# Altium PCB CL-HC-V2.1 浮点阀.PcbDoc (part 2 of 2)
Units mil, origin at the board's own origin, x right, y up, seen from the top; angles counter-clockwise.
Board outline 12846.15 x 9153.85 mil, 2 copper layers (TopLayer, BottomLayer); 128 components, 528 nets, 506 pads, 1 vias.
Unrouted connection lines stored in the file: 31.
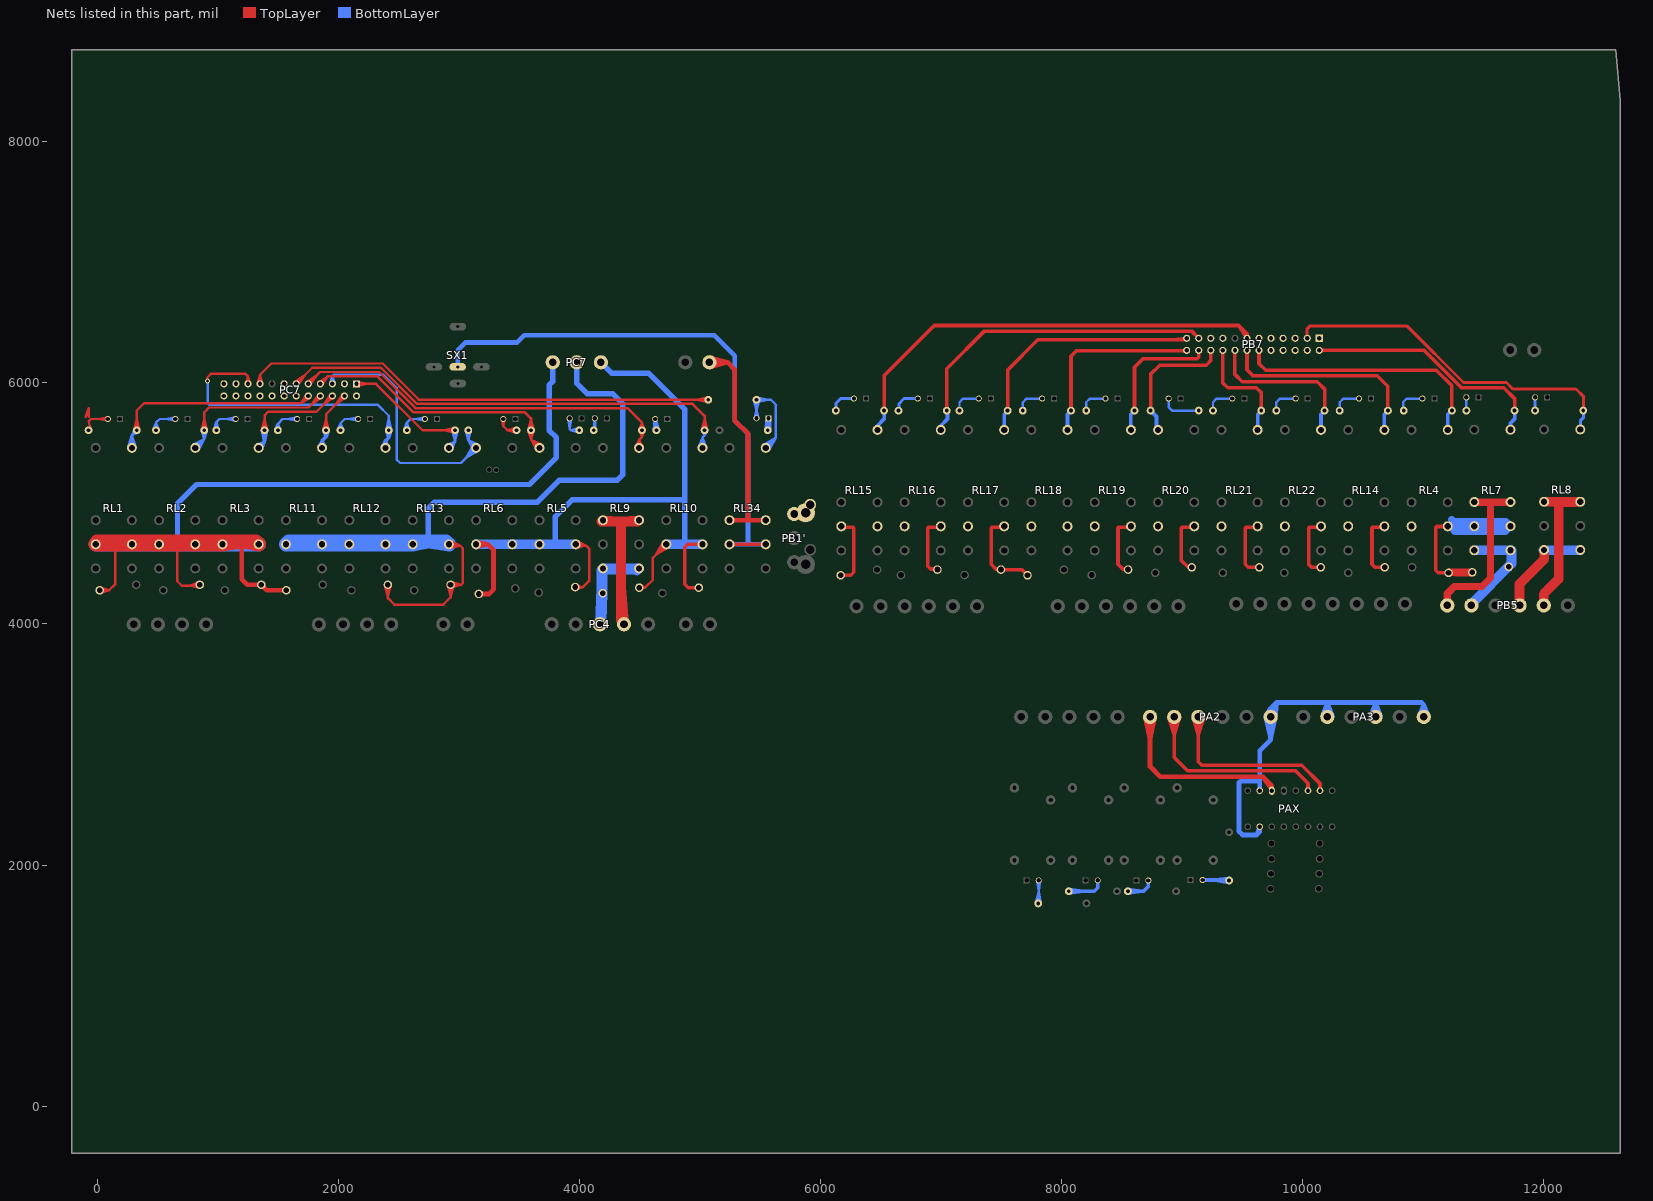
[diagram p2: the nets of this part, all layers, seen from the top]

## Via types
v1: diameter 40, hole 24, TopLayer to BottomLayer, tented both sides, 1 vias

## Nets (pads, with @x,y where several pads share a name; then routed paths per layer and width w, separated by ;. In a path a pad name is that pad's centre, name@x,y a point inside that pad or via, vN(x,y) a via of type N, cw(c..) or ccw(c..) an arc to the next point about the centre after c; other vN are vias at no path point) (continued)
GND: D110.K PA2.1 PA3.2 PA3.4 PA3.6 PAX.3 PAX.4 PB7.17 PC7.17 R293.1 R293.2 RL34.1 | length 11506.6
  TopLayer w20: PC7.17@1332.98,5994.1 1352.35,6067.35 ; PC7.17@1371.71,5994.1 1352.35,6067.35 ; R293.1@5067.1,5837.02 4977.49,5860 ; R293.1@5067.43,5881.68 4977.49,5860 ; R293.1@5070,5859.33 4977.49,5860 ; R293.1@5080,5860 2670,5860 2370,6160 1445,6160 1352.35,6067.35 ; 1352.35,6067.35 PC7.17@1352.35,5991.59 1352.35,6067.35
  BottomLayer w20: R293.2@5447.67,5856.59 5470,5766.83 R293.2@5492.33,5856.59 ; D110.K@5456.42,5707.03 5470,5789.55 D110.K@5483.58,5707.03 ; D110.K@5470,5705.92 R293.2@5470,5859.33 5562.51,5860 ; R293.2@5472.57,5881.68 5562.51,5860 ; R293.2@5472.9,5837.02 5562.51,5860 ; R293.2@5480,5860 5590,5860 5630,5820 5630,5543.74 ; RL34.1@5527.68,5485.35 5630,5543.74 ; RL34.1@5539.08,5468.84 5630,5543.74 ; RL34.1@5546.7,5460.44 5630,5543.74 ; RL34.1@5555.09,5452.82 5630,5543.74 ; RL34.1@5571.61,5441.43 5630,5543.74
  BottomLayer w40: PAX.3@9644.59,2617.3 9644.59,2695.06 ; PA2.1@9696.29,3224.64 9735.11,3049.84 ; PA2.1@9701.77,3249.24 9785.44,3348.9 ; PA2.1@9772.99,3219.37 9785.44,3348.9 ; PA2.1@9773.93,3224.64 9735.11,3049.84 ; PA3.2@10166.94,3235.45 10205.44,3345.28 ; 10191.82,3348.9 9785.44,3348.9 ; PA3.2@10205.44,3228.9 10205.44,3345.28 ; PA3.2@10243.94,3235.45 10205.44,3345.28 ; PA3.4@10566.97,3235.6 10605.44,3342.65 ; PA3.4@10605.44,3228.9 10605.44,3342.65 ; PA3.4@10643.92,3235.6 10605.44,3342.65 ; PA3.6@10967.14,3236.53 11005.44,3328.9 ; PA3.6@11005.44,3228.9 11005.44,3328.9 ; PA3.6@11043.75,3236.53 11005.44,3328.9 ; 9619.8,2250.42 PAX.4@9644.59,2317.3 ; 9619.8,2250.42 9502.3,2250.42 9471.39,2281.34 9471.39,2683.96 9482.48,2695.06 9644.59,2695.06 ; 9619.8,2250.42 9644.59,2275.21 ; 9644.59,2275.21 PAX.4@9644.59,2317.3 ; 9644.59,2275.21 PAX.4@9644.59,2317.3 ; 9644.59,2695.06 9644.59,2949.15 9735.11,3039.68 PA2.1@9735.11,3228.9 ; 9735.11,3049.84 PA2.1@9735.11,3228.9 ; PA2.1@9735.11,3228.9 9735.11,3298.57 ; PA2.1@9735.11,3228.9 9785.44,3348.9 ; PA2.1@9735.11,3228.9 9735.11,3298.57 ; 9735.11,3298.57 9772.6,3239.85 9735.11,3298.57 ; 9735.11,3298.57 9697.62,3239.85 9735.11,3298.57 ; 9735.11,3298.57 9785.44,3348.9 ; 10205.44,3345.28 10201.82,3348.9 10599.19,3348.9 ; 10599.19,3348.9 10985.44,3348.9 11005.44,3328.9 ; 10599.19,3348.9 10605.44,3342.65
IN2-A+: 
IN2-B-: 
IN-A+: 
IN-B-: 
L: pad.0@5876.88,4922.18 PB1'.3 PB1.2 RL4.4 RL7.4 RL14.4 RL15.4 RL16.4 RL17.4 RL18.4 RL19.4 RL20.4 RL21.4 RL22.4 RN1.1 RN2.1 RN3.1 RN4.1 RN5.1 RN6.1 RN11.1 RN12.1 RN13.1 RN14.1 RN21.1 | length 6808.8
  TopLayer w30: RN1.1@6168.25,4403.5 6252.7,4403.5 6276.74,4427.54 6276.74,4795.14 6268.4,4803.48 RL15.4@6177.43,4803.48 ; RN2.1@6977.89,4455.36 6914.78,4455.36 6891.27,4478.87 6891.27,4795.14 6899.61,4803.48 RL16.4@6990.58,4803.48 ; RN3.1@7498.23,4450.9 7670.85,4450.9 RN4.1@7718.25,4403.5 ; RN3.1@7503.6,4455.36 7455.63,4455.36 7416.98,4494.01 7416.98,4795.14 7425.32,4803.48 RL17.4@7516.3,4803.48 ; RN5.1@8555.03,4455.36 8507.06,4455.36 8468.4,4494.01 8468.4,4795.14 8476.75,4803.48 RL19.4@8567.72,4803.48 ; RN6.1@9080.61,4455.36 RN6.1@9080.74,4455.36 ; RN6.1@9080.61,4469.17 9050.59,4469.17 8994.12,4525.65 8994.12,4795.14 9002.46,4803.48 RL20.4@9093.43,4803.48 ; RL21.4@9623.41,4803.48 9532.44,4803.48 9524.1,4795.14 9524.1,4494.01 9548.94,4469.17 RN12.1@9629.17,4469.17 ; RL22.4@10149.12,4803.48 10058.15,4803.48 10049.81,4795.14 10049.81,4494.01 10074.65,4469.17 RN13.1@10150.61,4469.17 RN13.1@10154.88,4469.17 ; RL14.4@10674.84,4803.48 10583.86,4803.48 10575.52,4795.14 10575.52,4494.01 10600.37,4469.17 RN14.1@10680.61,4469.17 ; RL4.4@11203.32,4808.24 11112.34,4808.24 11104,4799.9 11104,4445.76 11126.27,4423.5 RN21.1@11209.07,4423.5
  TopLayer w60: RN21.1@11209.07,4423.5 11213.63,4428.06 RN11.1@11407.27,4428.06 ; 11270.19,4423.5 RN11.1@11392.11,4423.5
  BottomLayer w60: RL4.4@11204.09,4809.8 11205.21,4810.92 RL7.4@11424.12,4810.92 RL7.4@11724.12,4810.92 ; 11237.44,4866.91 11255.71,4848.63 11686.4,4848.63 RL7.4@11724.12,4810.92 ; 11255.71,4773.21 11260.85,4768.07 11681.27,4768.07 RL7.4@11724.12,4810.92
LAMP1: 
LAMP2: 
LAMP3: 
LAMP4: 
LAMP5: 
LAMP6: 
LAMP7: 
LAMP8: 
LAMP9: 
LAMP10: 
LAMP11: 
LAMP12: 
LAMP13: 
LAMP14: 
LOUT1: 
LOUT2: 
LOUT3: 
LOUT4: 
LOUT5: 
LOUT6: 
LOUT7: 
LOUT8: 
LOUT9: 
LOUT10: 
LOUT11: 
LOUT12: 
LOUT13: 
LOUT14: 
L加热: PC7.2@3980,6170 RL11.4 RL12.4 RL13.4 RN10.1 RN17.1 | length 12027.9
  TopLayer w20: RN10.1@2387.67,4321.84 2412.88,4229.79 RN10.1@2438.09,4321.84 ; RN10.1@2412.88,4325.23 2412.88,4213.77 2465.94,4160.71 2872.44,4160.71 2932.88,4221.15 RN17.1@2932.88,4325.23 3020.89,4325.23 ; RN17.1@2907.67,4321.84 2932.88,4229.79 RN17.1@2958.09,4321.84 ; RL13.4@2917.15,4649.21 2961.7,4648.77 ; RL13.4@2917.98,4649.13 3012.85,4648.77 ; RL13.4@2920.03,4629.13 3012.85,4648.77 ; RL13.4@2920.77,4671.59 3012.85,4648.77 ; RL13.4@2921.65,4629.24 2961.7,4648.77 ; RL13.4@2923.04,4670.92 2961.7,4648.77 ; RL13.4@2927.64,4690.48 3012.85,4648.77 ; RN17.1@2936.55,4300.06 3020.89,4325.23 ; RN17.1@2936.55,4350.39 3020.89,4325.23 ; RL13.4@2937.03,4685.87 2961.7,4648.77 ; 2961.7,4648.77 3012.85,4648.77 ; 2961.7,4648.77 RL13.4@2918.7,4660.44 3012.85,4648.77 ; 3012.85,4648.77 3034.55,4627.06 3034.55,4338.89 3020.89,4325.23
  BottomLayer w45: 2746.16,4683.35 2746.16,4958.72 2797.85,5010.41 3653,5010.41 3832.82,5190.24 4315.2,5190.24 4362.49,5237.53 4362.49,5825 4277.49,5910 4065.81,5910 3980,5995.81 PC7.2@3980,6170
  BottomLayer w118.11: 1692.12,4683.35 RL12.4@2092.83,4660.44 ; 1991.8,4683.35 RL12.4@2392.83,4660.44 ; 2217.55,4683.35 RL13.4@2618.7,4660.44 ; RL11.4@1566.95,4660.44 RL11.4@1589.86,4683.35 ; RL11.4@1566.95,4660.44 1972.97,4683.35 RL11.4@1866.95,4660.44 ; RL11.4@1566.95,4660.44 RL11.4@1866.95,4660.44 ; RL11.4@1589.86,4683.35 2746.16,4683.35 ; RL11.4@1589.86,4683.35 RL11.4@1866.95,4660.44 ; RL11.4@1866.95,4660.44 2268.03,4683.35 RL12.4@2092.83,4660.44 ; RL11.4@1866.95,4660.44 RL12.4@2092.83,4660.44 ; RL12.4@2092.83,4660.44 2493.73,4683.35 RL12.4@2392.83,4660.44 ; RL12.4@2092.83,4660.44 RL12.4@2392.83,4660.44 ; RL12.4@2392.83,4660.44 2746.16,4683.35 ; RL12.4@2392.83,4660.44 RL13.4@2618.7,4660.44 ; RL13.4@2618.7,4660.44 2746.16,4683.35 ; RL13.4@2618.7,4660.44 2746.16,4683.35 ; 2746.16,4683.35 2895.8,4683.35 RL13.4@2918.7,4660.44 2746.16,4683.35
L变频: PC7.3@4180,6170 RL5.4 RL6.4 RL10.4 RL34.4 RN8.1 RN9.1 RN23.1 RN24.1 SX1.4 | length 13107.6
  TopLayer w20: RL5.4@3965.44,4650.21 4056.41,4650.21 ; RN8.1@3965.81,4305.9 4026.1,4302.09 ; RN8.1@3969.59,4280.75 4026.1,4302.09 ; RL5.4@3969.85,4649.12 4056.41,4650.21 ; RL5.4@3970.45,4660.44 4056.41,4650.21 ; RL5.4@3972.44,4629.17 4056.41,4650.21 ; RL5.4@3972.52,4671.59 4056.41,4650.21 ; RN8.1@3972.72,4330.38 4026.1,4302.09 ; RN8.1@3978.13,4302.09 4026.1,4302.09 ; RL5.4@3979.73,4690.38 4056.41,4650.21 ; RN23.1@4497.57,4301.14 4545.54,4301.14 ; RN23.1@4504.31,4276.62 4545.54,4301.14 ; RN23.1@4504.31,4325.66 4545.54,4301.14 ; RL10.4@4697.19,4679.33 4639.05,4576.34 ; RL10.4@4711.02,4648.31 4610,4547.29 4610,4365.6 4545.54,4301.14 ; RL10.4@4713.76,4668.02 4639.05,4576.34 ; RL10.4@4722.2,4660.44 4639.05,4576.34 ; RL10.4@4729.87,4652.09 4639.05,4576.34 ; RL10.4@4741.37,4635.65 4639.05,4576.34 ; 4026.1,4302.09 4083.96,4359.95 4083.96,4622.66 4056.41,4650.21
  TopLayer w30: RN24.1@4992.2,4301.14 4904.09,4301.14 4876.38,4328.85 4876.38,4636.38 4900.44,4660.44 RL10.4@5022.2,4660.44 ; RL34.4@5246.7,4660.44 RL34.4@5546.7,4660.44
  TopLayer w39.37: RL6.4@3144.58,4660.44 3241.8,4660.44 ; RL6.4@3146.99,4638.92 3241.8,4660.44 ; RL6.4@3146.99,4681.96 3241.8,4660.44 ; RN9.1@3167.07,4248.75 3251.82,4248.75 3289.76,4286.69 3289.76,4612.48 3241.8,4660.44
  BottomLayer w39.37: SX1.4@2991.85,6131.84 2991.85,6269.64 3057.16,6334.95 3484.95,6334.95 3543.88,6393.88 5119.03,6393.88 5290,6222.9 5290,5686.31 5400,5576.31 5400,4680 5419.56,4660.44 ; RL34.4@5246.7,4660.44 5419.56,4660.44 ; RL34.4@5546.7,4660.44 5419.56,4660.44
  BottomLayer w45: 3802.08,4660.44 3802.08,4890.55 3943.31,5031.77 4876.38,5031.77 ; PC7.3@4180,6170 4271.28,6078.72 4577.66,6078.72 4876.38,5780 4876.38,5031.77 ; 4874.92,4664.25 4876.38,4665.71 4876.38,5031.77
  BottomLayer w80: RL6.4@3144.58,4660.44 RL6.4@3444.58,4660.44 RL5.4@3670.45,4660.44 3802.08,4660.44 ; RL10.4@4722.2,4660.44 RL10.4@5022.2,4660.44 ; 3802.08,4660.44 RL5.4@3970.45,4660.44 3802.08,4660.44
L预热: PC7.1@3780,6170 RL1.4 RL2.4 RL3.4 RN15.1 RN18.1 RN19.1 RN20.1 | length 15121.1
  TopLayer w20: RL1.4@-10.82,4671.78 91.52,4667.46 ; RL1.4@-10.67,4660.44 91.52,4667.46 ; RL1.4@-9.27,4649.19 91.52,4667.46 ; RL1.4@-8.01,4691.67 91.52,4667.46 ; RL1.4@-3.76,4629.87 91.52,4667.46 ; RL1.4@18.6,4667.46 109.58,4667.46 150,4627.04 150,4328.2 100.71,4278.91 ; RN18.1@21.95,4278.91 100.71,4278.91 ; RN18.1@26.06,4253.81 100.71,4278.91 ; RN18.1@26.06,4304.01 100.71,4278.91 ; RL2.4@807.45,4690.81 713.62,4650.67 ; RL2.4@813.38,4629.16 713.62,4650.67 ; RL2.4@813.5,4671.65 713.62,4650.67 ; RL2.4@815.21,4660.44 713.62,4650.67 ; RL2.4@815.66,4649.11 713.62,4650.67 ; RN19.1@846.19,4349.77 771.98,4316.36 ; RL2.4@846.45,4650.67 665.44,4650.67 665.44,4354.68 703.76,4316.36 RN19.1@852.21,4316.36 ; RN19.1@851.67,4299.82 771.98,4316.36 ; RN19.1@852.88,4325.23 771.98,4316.36
  TopLayer w39.37: 1200,4683.35 1200,4371.68 1246.46,4325.23 RN20.1@1362.88,4325.23 1408.55,4279.56 RN15.1@1570.52,4279.56
  TopLayer w118.11: 114.48,4683.35 RL2.4@515.21,4660.44 ; 391.97,4683.35 RL1.4@-10.67,4660.44 RL1.4@289.33,4660.44 ; 639.92,4683.35 RL3.4@1041.08,4660.44 ; 915.95,4683.35 RL2.4@515.21,4660.44 ; 1200,4683.35 RL3.4@1041.08,4683.35 ; RL1.4@289.33,4660.44 690.33,4683.35 RL2.4@515.21,4660.44 ; RL1.4@289.33,4660.44 -0.59,4683.35 RL3.4@1041.08,4683.35 ; RL1.4@289.33,4660.44 RL2.4@515.21,4660.44 ; RL2.4@515.21,4660.44 RL2.4@815.21,4660.44 ; RL2.4@515.21,4660.44 414.17,4683.35 RL2.4@815.21,4660.44 ; RL2.4@815.21,4660.44 RL3.4@1041.08,4683.35 ; RL2.4@815.21,4660.44 RL3.4@1041.08,4660.44 ; RL3.4@1041.08,4660.44 1215.91,4683.35 ; 1215.91,4683.35 1318.18,4683.35 RL3.4@1341.08,4660.44 1215.91,4683.35
  BottomLayer w45: 667.72,4676.46 667.72,4999.29 825.2,5156.77 3586.02,5156.77 3810.43,5381.18 3810.43,5545.88 3750,5606.31 3750,5980 3780,6010 PC7.1@3780,6170
  BottomLayer w118.11: RL1.4@-10.67,4660.44 RL1.4@289.33,4660.44 RL2.4@515.21,4660.44 RL2.4@815.21,4660.44 RL3.4@1041.08,4660.44 RL3.4@1341.08,4660.44
NetC1_1: 
NetC14_1: 
NetC43_2: 
NetC44_2: 
NetD1_A: 
NetD6_A: 
NetD7_A: 
NetD8_A: 
NetD9_A: 
NetD10_A: 
NetD11_A: 
NetD12_A: 
NetD13_A: 
NetD14_A: 
NetD15_A: 
NetD15_K: D15.K R215.1 | length 589.9
  BottomLayer w30: D15.K@9170.84,1876.11 9386.95,1876.11 R215.1@9390.84,1872.22 9268.15,1876.11 ; R215.1@9389.04,1854.81 9268.15,1876.11 ; R215.1@9390.14,1889.71 9268.15,1876.11
NetD16_A: 
NetD16_K: D16.K R216.1 | length 481.6
  BottomLayer w30: R216.1@8550.84,1782.22 8680.84,1782.22 8720.84,1822.22 D16.K@8720.84,1872.22 ; R216.1@8552.09,1764.77 8673.34,1782.22 R216.1@8552.09,1799.68
NetD17_A: 
NetD17_K: D17.K R217.1 | length 557.9
  BottomLayer w30: R217.1@8060.84,1782.22 8270.84,1782.22 8300.84,1812.22 D17.K@8300.84,1872.74 ; R217.1@8062.09,1764.77 8183.34,1782.22 R217.1@8062.09,1799.68
NetD18_A: 
NetD18_K: D18.K R218.1 | length 637.8
  BottomLayer w20: R218.1@7784.63,1685.91 7810.84,1774.91 ; D18.K@7797.26,1871.63 7810.84,1789.11 D18.K@7824.41,1871.63 ; D18.K@7810.84,1872.74 7810.84,1686.24 R218.1@7806.82,1682.22 7810.84,1774.91 ; R218.1@7829.25,1683.98 7810.84,1774.91
NetD19_A: 
NetD20_A: 
NetD21_A: 
NetD22_A: 
NetD23_A: 
NetD24_A: 
NetD25_A: 
NetD26_A: 
NetD27_A: 
NetD28_A: 
NetD29_A: 
NetD30_A: 
NetD31_A: 
NetD32_A: 
NetD33_A: 
NetD34_A: 
NetD35_K: 
NetD36_K: 
NetD37_K: D37.K R147.1 | length 332.8
  BottomLayer w20: D37.K@8888.5,5869.33 8888.5,5799.33 8918.14,5769.7 R147.1@9139.03,5769.7
NetD38_K: D38.K R148.1 | length 242.4
  BottomLayer w20: R148.1@8205.4,5769.33 8205.4,5839.33 8235.4,5869.33 D38.K@8365.4,5869.33
NetD39_K: D39.K R149.1 | length 242.4
  BottomLayer w20: R149.1@7679.77,5769.33 7679.77,5839.33 7709.77,5869.33 D39.K@7839.77,5869.33
NetD40_K: D40.K R150.1 | length 242.4
  BottomLayer w20: R150.1@7154.14,5769.33 7154.14,5839.33 7184.14,5869.33 D40.K@7314.14,5869.33
NetD41_K: D41.K R151.1 | length 226.6
  BottomLayer w25: R151.1@6654.14,5769.33 6654.14,5829.33 6694.14,5869.33 D41.K@6804.14,5869.33
NetD42_K: D42.K R152.1 | length 226.6
  BottomLayer w25: R152.1@6128.5,5769.33 6128.5,5829.33 6168.5,5869.33 D42.K@6278.5,5869.33
NetD43_K: D43.K R153.1 | length 109.6
  BottomLayer w25: R153.1@11928.5,5769.7 D43.K@11928.5,5879.33
NetD44_K: D44.K R154.1 | length 110
  BottomLayer w20: R154.1@11358.5,5769.33 D44.K@11358.5,5879.33
NetD45_K: D45.K R155.1 | length 242.4
  BottomLayer w20: R155.1@10307.93,5769.33 10307.93,5839.33 10337.93,5869.33 D45.K@10467.93,5869.33
NetD46_K: D46.K R156.1 | length 242.4
  BottomLayer w20: R156.1@9256.67,5769.33 9256.67,5839.33 9286.67,5869.33 D46.K@9416.67,5869.33
NetD47_K: D47.K R157.1 | length 242.4
  BottomLayer w20: R157.1@9782.3,5769.33 9782.3,5839.33 9812.3,5869.33 D47.K@9942.3,5869.33
NetD48_K: D48.K R158.1 | length 242.4
  BottomLayer w20: R158.1@10833.56,5769.33 10833.56,5839.33 10863.56,5869.33 D48.K@10993.56,5869.33
NetD49_K: D49.K R159.1 | length 380.4
  BottomLayer w30: R159.1@4622.36,5606.1 D49.K@4630,5700 ; R159.1@4657.02,5609.75 D49.K@4630,5700 ; D49.K@4630,5700 R159.1@4639.86,5606.31 4630,5616.17 D49.K@4630,5700
NetD50_K: D50.K R160.1 | length 543.4
  BottomLayer w20: R160.1@967.66,5610 989.86,5674.86 ; R160.1@989.86,5606.31 989.86,5674.86 ; R160.1@1012.05,5610 989.86,5674.86 ; D50.K@1148.89,5686.42 1066.38,5700 D50.K@1148.89,5713.58 ; D50.K@1150,5700 1015,5700 989.86,5674.86
NetD51_K: D51.K R161.1 | length 530.5
  BottomLayer w20: R161.1@467.72,5610.3 489.86,5669.86 ; R161.1@489.86,5606.31 489.86,5669.86 ; R161.1@512,5610.3 489.86,5669.86 ; D51.K@648.89,5686.42 566.38,5700 D51.K@648.89,5713.58 ; D51.K@650,5700 520,5700 489.86,5669.86
NetD52_K: D52.K R162.1 | length 556.4
  TopLayer w20: -92.38,5719.75 -70.14,5789.86 -70.14,5716.31 ; R162.1@-47.91,5609.75 -70.14,5679.86 -50,5700 D52.K@90,5700 ; D52.K@88.89,5686.42 6.38,5700 D52.K@88.89,5713.58
NetD53_K: D53.K R163.1 | length 520.5
  BottomLayer w20: R163.1@2547.72,5610.3 2569.86,5669.86 ; R163.1@2569.86,5606.31 2569.86,5669.86 ; R163.1@2592,5610.3 2569.86,5669.86 ; D53.K@2718.89,5686.42 2636.38,5700 D53.K@2718.89,5713.58 ; D53.K@2720,5700 2600,5700 2569.86,5669.86
NetD54_K: D54.K R164.1 | length 503.2
  BottomLayer w20: R164.1@1997.78,5610.64 2019.86,5664.86 ; R164.1@2019.86,5606.31 2019.86,5664.86 ; R164.1@2041.94,5610.64 2019.86,5664.86 ; D54.K@2164.53,5686.42 2082.02,5700 D54.K@2164.53,5713.58 ; D54.K@2165.64,5700 2055,5700 2019.86,5664.86
NetD55_K: D55.K R165.1 | length 504.7
  BottomLayer w20: R165.1@1477.86,5611.04 1499.86,5659.86 ; R165.1@1499.86,5606.31 1499.86,5659.86 ; R165.1@1521.86,5611.04 1499.86,5659.86 ; D55.K@1658.89,5686.42 1576.38,5700 D55.K@1658.89,5713.58 ; D55.K@1660,5700 1540,5700 1499.86,5659.86
NetD56_K: 
NetD57_K: 
NetD58_K: 
NetD59_K: 
NetD60_K: 
NetD61_K: D61.K R171.1 | length 452.9
  TopLayer w20: D61.K@3356.47,5698.43 3370,5640.8 ; D61.K@3370,5700 3370,5640.8 ; D61.K@3383.53,5698.43 3370,5640.8 ; R171.1@3476.65,5584.06 3404.49,5606.31 ; R171.1@3476.65,5628.56 3404.49,5606.31 ; R171.1@3480,5606.31 3404.49,5606.31 ; 3370,5640.8 3404.49,5606.31
NetD62_K: 
NetD63_K: 
NetD64_K: 
NetD65_K: D65.K R175.1 | length 480.3
  BottomLayer w20: D65.K@3906.42,5703.89 3920,5621.38 D65.K@3933.58,5703.89 ; D65.K@3920,5705 3920,5616.63 3930.32,5606.31 ; R175.1@3996.74,5584.1 3930.32,5606.31 ; R175.1@3996.74,5628.52 3930.32,5606.31 ; R175.1@4000.36,5606.31 3930.32,5606.31
NetD66_K: 
NetD67_K: D67.K R177.1 | length 103.5
  BottomLayer w30: R177.1@4120,5606.31 4129.27,5615.58 D67.K@4129.27,5705.92
NetD71_A: 
NetD72_K: 
NetD73_K: 
NetD74_A: 
NetD74_K: 
NetD75_A: 
NetD75_K: 
NetD76_K: 
NetD77_K: 
NetD78_K: 
NetD79_K: 
NetD80_K: 
NetD81_K: 
NetD82_K: 
NetD83_K: 
NetD84_K: 
NetD85_K: 
NetD86_K: 
NetD87_K: 
NetD88_K: 
NetD89_K: 
NetD90_K: 
NetD91_K: 
NetD92_K: 
NetD93_K: 
NetD94_K: 
NetD95_A: 
NetD96_A: 
NetD97_A: 
NetD98_A: 
NetD99_A: 
NetD100_A: 
NetD101_A: 
NetD102_A: 
NetD103_A: 
NetD104_A: 
NetD105_A: 
NetD106_A: 
NetD106_K: 
NetD107_A: 
NetD107_K: 
NetD108_A: 
NetD108_K: 
NetD109_A: 
NetD110_A: D110.A R292.2 | length 1306.1
  BottomLayer w20: R292.2@5541.3,5610.61 D110.A@5570,5699.19 ; D110.A@5556.38,5705.7 R292.2@5564.53,5622.42 ; D110.A@5556.42,5704.81 5570,5622.3 D110.A@5583.58,5704.81 ; D110.A@5556.67,5708.74 R292.2@5545.86,5624.68 ; D110.A@5556.76,5702.7 R292.2@5583.17,5623.01 ; D110.A@5582.7,5701.01 R292.2@5545.86,5624.68 ; D110.A@5583.48,5703.93 R292.2@5564.53,5622.42 ; D110.A@5583.58,5706.96 R292.2@5583.17,5623.01 ; R292.2@5585.86,5607.44 D110.A@5570,5699.19 ; R292.2@5545.86,5624.68 D110.A@5570,5705.92 ; R292.2@5564.53,5622.42 D110.A@5570,5705.92 ; D110.A@5570,5699.19 R292.2@5563.39,5606.31 5570,5612.93 D110.A@5570,5705.92 ; D110.A@5570,5705.92 R292.2@5583.17,5623.01
NetD199_A: 
NetDZ1_K: 
NetF1_1: 
NetF2_1: 
NetF3_1: 
NetF4_1: 
NetF5_1: 
NetF6_1: 
NetF9_2: 
NetQ1_1: 
NetQ1_2: 
NetQ2_2: 
NetQ3_2: 
NetQ4_1: 
NetQ4_2: 
NetQ5_1: 
NetQ5_2: 
NetQ6_2: 
NetQ7_1: 
NetQ7_2: 
NetQ8_2: 
NetQ9_1: 
NetQ9_2: 
NetQ10_2: 
NetQ11_2: 
NetQ12_2: 
NetQ13_1: 
NetQ13_2: 
NetQ13_3: 
NetQ14_1: 
NetQ15_2: 
NetQ15_3: 
NetQ16_2: 
NetQ17_2: 
NetQ18_1: 
NetQ18_2: 
NetQ18_3: 
NetQ19_1: 
NetQ19_2: 
NetQ20_2: 
NetQ21_2: 
NetQ22_2: 
NetQ23_2: 
NetQ24_2: 
NetQ25_2: 
NetR15_2: 
NetR16_2: 
NetR17_2: 
NetR18_2: 
NetR19_2: 
NetR20_2: 
NetR21_2: 
NetR22_2: 
NetR23_2: 
NetR24_2: 
NetR25_2: 
NetR26_2: 
NetR27_2: 
NetR28_2: 
NetR29_2: 
NetR30_2: 
NetR31_2: 
NetR32_2: 
NetR33_2: 
NetR34_2: 
NetR36_1: 
NetR68_2: 
NetR69_2: 
NetR70_2: 
NetR71_2: 
NetR88_1: 
NetR89_1: 
NetR91_2: 
NetR92_1: 
NetR93_2: 
NetR94_2: 
NetR95_2: 
NetR96_2: 
NetR97_2: 
NetR98_2: 
NetR178_2: 
NetR179_1: 
NetR179_2: 
NetR192_1: 
NetR196_2: 
NetR197_1: 
NetR199_1: 
NetR200_2: 
NetR201_2: 
NetR204_1: 
NetR209_1: 
NetR211_2: 
NetR212_1: 
NetR213_2: 
NetR293_1: 
NetR294_1: 
NetRL34_5: PC6.1 RL34.5 | length 2130
  TopLayer w39.37: PC6.1@5080,6170 5230,6170 ; PC6.1@5085.17,6130.97 5230,6170 ; PC6.1@5085.17,6209.03 5230,6170 ; RL34.5@5246.7,4860.44 RL34.5@5546.7,4860.44 ; 5400,4860.44 5400,5576.31 5290,5686.31 5290,6110 5230,6170
NetU1X_2: 
NetU1X_4: 
NetU42_2: 
NetU55_2: 
OSC1: 
OSC2: 
OSC3: 
OSC4: 
OUT1: 
OUT2: 
OUT3: 
OUT4: 
OUT5: 
OUT6: 
OUT7: 
OUT8: 
OUT9: 
OUT10: 
OUT11: 
OUT12: 
OUT13: 
OUT14: 
OUT15: 
OUT15X: 
OUT16: 
OUT17: 
OUT18: 
OUT19: 
OUT20: 
OUT21: 
OUT22: 
OUT23: 
OUT24: 
OUT25: 
OUT26: 
OUT27: 
OUT28: 
OUT29: 
OUT30: 
OUT31: 
OUT32: 
PLD_165: 
POL_A2: 
POL_B2: 
RESET1: 
RESET2: 
ROUT1: PB7.2 PC7.2@2152.35,5891.59 R154.2 RL7.2 | length 2072.4
  TopLayer w30: PB7.2@10138.5,6269.33 11007.73,6269.33 11317.73,5959.33 11668.5,5959.33 11758.5,5869.33 R154.2@11758.5,5769.33 ; RL7.2@11733.39,5609.8 RL7.2@11743.3,5619.7
  BottomLayer w30: RL7.2@11724.12,5610.92 11724.12,5664.94 11758.5,5699.33 R154.2@11758.5,5769.33
ROUT2: PB7.4 PC7.1@2152.35,5991.59 R163.2 RL13.2 | length 1982.6
  TopLayer w20: PC7.1@2152.35,5991.59 2315.43,5991.59 2700.7,5606.31 R163.2@2969.86,5606.31 ; PC7.1@2154.48,5972.17 2241.87,5991.59 PC7.1@2154.48,6011 ; R163.2@2967.12,5583.98 2877.36,5606.31 R163.2@2967.12,5628.64
  BottomLayer w20: RL13.2@2901.87,5486.88 2969.86,5511.6 ; RL13.2@2911.34,5469.06 2969.86,5511.6 ; RL13.2@2918.7,5460.44 2969.86,5511.6 ; RL13.2@2927.32,5453.08 2969.86,5511.6 ; RL13.2@2945.14,5443.61 2969.86,5511.6 ; R163.2@2947.53,5603.58 2969.86,5513.81 R163.2@2992.19,5603.58 ; R163.2@2969.86,5606.31 2969.86,5511.6
ROUT3: PB7.6 PC7.6 R160.2 RL3.2 | length 1741.7
  TopLayer w20: R160.2@1367.53,5609.05 1389.86,5698.81 R160.2@1412.19,5609.05 ; R160.2@1389.86,5606.31 1389.86,5730.16 1419.7,5760 1820.76,5760 PC7.6@1952.35,5891.59 1880.39,5819.63 ; PC7.6@1937.28,5904 1880.39,5819.63 ; PC7.6@1964.77,5876.52 1880.39,5819.63
  BottomLayer w25: RL3.2@1325.4,5484.65 1389.86,5509.22 ; RL3.2@1341.08,5460.44 1389.86,5509.22 ; RL3.2@1365.28,5444.76 1389.86,5509.22 ; R160.2@1369.97,5604.25 1389.86,5509.22 ; R160.2@1389.86,5606.31 1389.86,5509.22 ; R160.2@1409.75,5604.25 1389.86,5509.22
ROUT4: PB7.8 PC7.8 R161.2 RL2.2 | length 2399.5
  TopLayer w20: R161.2@867.53,5609.05 889.86,5698.81 R161.2@912.19,5609.05 ; R161.2@889.86,5606.31 889.86,5754.86 930,5795 1755.76,5795 PC7.8@1852.35,5891.59 1780.39,5819.63 ; PC7.8@1837.28,5904 1780.39,5819.63 ; PC7.8@1864.77,5876.52 1780.39,5819.63
  BottomLayer w20: RL2.2@796.58,5485.65 889.86,5535.1 ; RL2.2@807.63,5468.88 889.86,5535.1 ; RL2.2@815.21,5460.44 889.86,5535.1 ; RL2.2@823.64,5452.87 889.86,5535.1 ; RL2.2@840.41,5441.82 889.86,5535.1 ; R161.2@867.64,5602.76 889.86,5535.1 ; R161.2@889.86,5606.31 889.86,5535.1 ; R161.2@912.08,5602.76 889.86,5535.1
ROUT5: PB7.10 PC7.10 R162.2 RL1.2 | length 2765.4
  TopLayer w20: R162.2@307.53,5609.05 329.86,5698.81 R162.2@352.19,5609.05 ; R162.2@329.86,5606.31 329.86,5769.86 390,5830 1690.76,5830 ; PC7.10@1737.08,5903.76 1690.76,5830 ; PC7.10@1764.52,5876.32 1690.76,5830 ; 1690.76,5830 PC7.10@1752.35,5891.59 1690.76,5830
  BottomLayer w20: RL1.2@258.37,5465.29 289.33,5561.78 ; RL1.2@278.01,5461.08 289.33,5561.78 ; RL1.2@289.33,5460.44 289.33,5565.78 ; RL1.2@300.65,5461.08 289.33,5561.78 ; R162.2@311.14,5618.79 289.33,5565.78 ; RL1.2@320.29,5465.29 289.33,5561.78 ; R162.2@329.86,5606.31 289.33,5565.78 ; R162.2@342.34,5587.59 289.33,5565.78
ROUT6: PB7.12 PC7.12 R158.2 RL4.2 | length 2163.7
  TopLayer w30: PB7.12@9638.5,6269.33 9638.5,6159.33 9693.5,6104.33 11109.09,6104.33 11238.5,5974.92 R158.2@11238.5,5769.33
  BottomLayer w30: RL4.2@11204.09,5609.8 11204.09,5739.86 R158.2@11233.56,5769.33
ROUT7: PB7.14 PC7.14 R155.2 RL14.2 | length 1766.9
  TopLayer w30: PB7.14@9538.5,6269.33 9538.5,6109.33 9588.5,6059.33 10618.5,6059.33 10707.41,5970.43 R155.2@10707.41,5768.96
  BottomLayer w30: RL14.2@10678.46,5609.8 10678.46,5739.86 R155.2@10707.93,5769.33 ; RL14.2@10681.11,5602.53 RL14.2@10681.11,5609.8
ROUT8: PB7.16 PC7.16 R157.2 RL22.2 | length 1345.1
  TopLayer w30: PB7.16@9438.5,6269.33 9438.5,6069.33 9498.5,6009.33 10122.11,6009.33 10182.3,5949.14 R157.2@10182.3,5769.33
  BottomLayer w30: RL22.2@10152.83,5609.8 10152.83,5739.86 R157.2@10182.3,5769.33
ROUT9: PB7.18 PC7.18 R156.2 RL21.2 | length 943
  TopLayer w30: PB7.18@9338.5,6269.33 9338.5,5999.33 9378.5,5959.33 9616.67,5959.33 9656.67,5919.33 R156.2@9656.67,5769.33
  BottomLayer w30: RL21.2@9627.2,5609.8 9627.2,5739.86 R156.2@9656.67,5769.33
ROUT10: PB7.20 PC7.20 R147.2 RL20.1 | length 1117.3
  TopLayer w30: R147.2@8739.03,5769.7 8739.03,6069.86 8815.9,6146.72 9199.88,6146.72 9238.5,6185.35 PB7.20@9238.5,6269.33
  BottomLayer w30: R147.2@8739.03,5769.7 8788.5,5720.22 8788.5,5622.86 RL20.1@8801.56,5609.8
ROUT11: PB7.22 PC7.22 R148.2 RL19.2 | length 1156.7
  TopLayer w30: R148.2@8605.4,5769.33 8605.4,6129.33 8676.35,6200.28 9127.29,6200.28 9138.5,6211.49 PB7.22@9138.5,6269.33
  BottomLayer w30: RL19.2@8575.93,5609.8 8575.93,5739.86 R148.2@8605.4,5769.33
ROUT12: PB7.24 PC7.24 R149.2 RL18.2 | length 1723
  TopLayer w30: R149.2@8079.24,5768.96 8079.24,6220.07 8123.71,6264.54 9033.71,6264.54 PB7.24@9038.5,6269.33 8918.08,6264.54
  BottomLayer w30: RL18.2@8050.3,5609.8 8050.3,5739.86 R149.2@8079.77,5769.33
ROUT13: PB7.23 PC7.23 R150.2 RL17.2 | length 2227.1
  TopLayer w30: R150.2@7553.61,5768.96 7553.61,6107.11 7802.67,6356.17 9025.34,6356.17 PB7.23@9038.5,6369.33 8915.46,6356.17
  BottomLayer w30: RL17.2@7524.67,5609.8 7524.67,5739.86 R150.2@7554.14,5769.33
ROUT14: PB7.21 PC7.21 R151.2 RL16.2 | length 2774.1
  TopLayer w30: R151.2@7048.5,5768.96 7048.5,6116.1 7361.74,6429.33 9078.5,6429.33 PB7.21@9138.5,6369.33
  BottomLayer w30: RL16.2@6999.03,5609.8 6999.03,5644.23 7054.14,5699.33 R151.2@7054.14,5769.33
ROUT15: 
ROUT15X: 
ROUT16: 
ROUT17: 
ROUT18: 
ROUT19: 
ROUT20: 
ROUT21: 
ROUT22: PB7.13 PC7.13 R152.2 RL15.2 | length 3882.8
  TopLayer w30: R152.2@6528.5,5769.33 6528.5,6057.97 6945.7,6475.17 9469.9,6475.17 ; 9469.9,6475.17 PB7.13@9538.5,6369.33 ; 9469.9,6475.17 9538.5,6406.56 ; PB7.13@9538.5,6369.33 9538.5,6406.56 ; PB7.13@9538.5,6369.33 9538.5,6406.56
  BottomLayer w30: RL15.2@6473.4,5609.8 6473.4,5644.23 6528.5,5699.33 R152.2@6528.5,5769.33
ROUT23: PB7.11 PC7.11 R159.2 RL10.2 | length 4796.2
  TopLayer w20: PC7.11@1639.93,6006.65 1724.3,6063.54 ; PC7.11@1667.41,5979.17 1724.3,6063.54 ; R159.2@5017.53,5609.05 5039.86,5698.81 R159.2@5062.19,5609.05 ; R159.2@5039.86,5606.31 5039.86,5725.14 4940,5825 2655.5,5825 2355.5,6125 1785.76,6125 PC7.11@1652.35,5991.59 1724.3,6063.54
  BottomLayer w20: RL10.2@4991.4,5466.25 5022.2,5545 ; RL10.2@5010.89,5461.2 5022.2,5545 ; R159.2@5018.12,5600.51 5039.86,5562.66 ; RL10.2@5022.2,5460.44 5022.2,5545 ; RL10.2@5033.51,5461.2 5022.2,5545 ; R159.2@5039.86,5606.31 5039.86,5562.66 ; RL10.2@5052.99,5466.25 5022.2,5545 ; R159.2@5061.6,5600.51 5039.86,5562.66 ; 5022.2,5545 5039.86,5562.66
ROUT24: PB7.9 PC7.9 R177.2 RL9.2 | length 4011.6
  TopLayer w20: PC7.9@1739.93,6006.65 1824.3,6063.54 ; PC7.9@1767.41,5979.17 1824.3,6063.54 ; RL9.2@4465.87,5467.84 4496.32,5526.86 ; RL9.2@4485.03,5461.41 4496.32,5526.86 ; RL9.2@4496.32,5460.44 4496.32,5526.86 ; R177.2@4497.85,5610.29 4520,5670 ; R177.2@4497.96,5601.77 4520,5550.54 ; RL9.2@4507.62,5461.41 4496.32,5526.86 ; RL9.2@4526.78,5467.84 4496.32,5526.86 ; R177.2@4542.04,5601.77 4520,5550.54 ; R177.2@4542.15,5610.29 4520,5670 ; 1824.3,6063.54 PC7.9@1752.35,5991.59 1850.76,6090 2341.01,6090 2641.01,5790 4400,5790 4520,5670 ; 4496.32,5526.86 4520,5550.54 ; 4520,5550.54 R177.2@4520,5606.31 4520,5670
ROUT25: PB7.7 PC7.7 R175.2 RL5.1 | length 3187.5
  TopLayer w20: PC7.7@1840.16,6006.84 1914.34,6053.58 ; PC7.7@1867.61,5979.4 1914.34,6053.58 ; R175.2@3578.02,5609.05 3600.36,5698.81 R175.2@3622.69,5609.05 ; R175.2@3578.11,5602.97 3600.36,5530.54 ; R175.2@3622.61,5602.97 3600.36,5530.54 ; RL5.1@3645.07,5442.06 3600.36,5530.54 ; RL5.1@3661.99,5452.9 3600.36,5530.54 ; RL5.1@3670.45,5460.44 3600.36,5530.54 ; RL5.1@3678,5468.9 3600.36,5530.54 ; RL5.1@3688.83,5485.83 3600.36,5530.54 ; 1914.34,6053.58 PC7.7@1852.35,5991.59 1914.34,6053.58 ; 1914.34,6053.58 2327.93,6053.58 2626.51,5755 3550,5755 3600.36,5704.64 R175.2@3600.36,5606.31 3600.36,5530.54
ROUT26: PB7.5 PC7.5 R171.2 RL6.1 | length 3335.3
  BottomLayer w20: PC7.5@1933.03,5994.48 1952.35,6057.35 ; PC7.5@1971.66,5994.48 1952.35,6057.35 ; R171.2@3057.72,5603.2 3080,5525.02 ; R171.2@3080,5606.31 3080,5525.02 ; R171.2@3102.28,5603.2 3080,5525.02 ; RL6.1@3118.94,5442.41 3080,5525.02 ; RL6.1@3119.68,5479.48 3060.81,5376.68 ; RL6.1@3136.08,5452.94 3080,5525.02 ; RL6.1@3136.18,5468.07 3060.81,5376.68 ; RL6.1@3152.08,5468.94 3080,5525.02 ; RL6.1@3152.2,5452.05 3060.81,5376.68 ; RL6.1@3162.61,5486.08 3080,5525.02 ; RL6.1@3163.61,5435.55 3060.81,5376.68 ; 1952.35,6057.35 1961.31,6066.31 2376.19,6066.31 2485,5957.51 2485,5365 2515,5335 3019.13,5335 RL6.1@3144.58,5460.44 3080,5525.02 ; 1952.35,6057.35 PC7.5@1952.35,5991.59 1952.35,6057.35
ROUT27: PB7.3 PC7.3@2052.35,5991.59 R153.2 RL8.2 | length 2904.7
  TopLayer w25: PB7.3@10038.5,6369.33 10038.5,6449.33 10058.5,6469.33 10867.84,6469.33 11335.34,6001.83 11690.8,6001.83 11743.3,5949.33 12268.5,5949.33 12328.5,5889.33 R153.2@12328.5,5769.7
  BottomLayer w25: RL8.2@12303.49,5613.54 12303.49,5684.32 12328.5,5709.33 R153.2@12328.5,5769.7
ROUT28: PB7.1 PC7.4 R165.2 RL11.2 | length 1224.1
  TopLayer w20: R165.2@1877.53,5609.05 1899.86,5698.81 R165.2@1922.19,5609.05 ; R165.2@1899.86,5606.31 1899.86,5739.1 PC7.4@2052.35,5891.59 1980.39,5819.63 ; PC7.4@2037.28,5904 1980.39,5819.63 ; PC7.4@2064.77,5876.52 1980.39,5819.63
  BottomLayer w30: RL11.2@1841.28,5466.33 1866.95,5519.31 ; RL11.2@1866.95,5460.44 1866.95,5519.31 ; R165.2@1882.59,5603.48 1899.86,5552.22 ; RL11.2@1892.63,5466.33 1866.95,5519.31 ; R165.2@1899.86,5606.31 1899.86,5552.22 ; R165.2@1917.13,5603.48 1899.86,5552.22 ; 1866.95,5519.31 1899.86,5552.22
ROUT29: PB7.19 PC7.19 R164.2 RL12.2 | length 3089.5
  TopLayer w20: v1(916.59,6014.35) 916.59,6046.37 944.01,6073.8 1231.09,6073.8 1252.35,6052.54 ; PC7.19@1233.07,5994.71 1252.35,6052.54 ; PC7.19@1252.35,5991.59 1252.35,6052.54 ; PC7.19@1271.62,5994.71 1252.35,6052.54
  BottomLayer w20: 919.2,5934.24 v1(916.59,6014.35) 916.59,6016.74 919.2,6019.35 919.2,5830.8 933.41,5816.59 2168.41,5816.59 2330.05,5816.59 2419.86,5726.77 R164.2@2419.86,5606.31 ; R164.2@2397.53,5609.05 2419.86,5698.81 R164.2@2442.19,5609.05
  BottomLayer w30: RL12.2@2367.19,5466.49 2392.83,5517.83 ; RL12.2@2392.83,5460.44 2392.83,5517.83 ; R164.2@2402.54,5603.82 2419.86,5544.86 ; RL12.2@2418.46,5466.49 2392.83,5517.83 ; R164.2@2419.86,5606.31 2419.86,5544.86 ; R164.2@2437.18,5603.82 2419.86,5544.86 ; 2392.83,5517.83 2419.86,5544.86
ROUT30: 
ROUT31: 
ROUT32: 
RX: 
RX2: 
RX3: 
SDO_165: 
TX: 
TX2: 
TX3: 
VCC: 
VPP1: 
VPP2: 
三角接法: PC4.2 RL9.5 | length 1761.8
  TopLayer w80: RL9.5@4184.87,4849.26 4346.39,4849.26 ; RL9.5@4196.32,4860.44 4346.39,4849.26 ; 4346.39,4305.78 PC4.2@4371.46,3996.99 ; PC4.2@4371.02,4008.31 4346.39,4032.94 4346.39,4849.26 ; RL9.5@4484.87,4849.26 4346.39,4849.26 ; RL9.5@4496.32,4860.44 4346.39,4849.26
中效: 
亚高效: 
冷/热水: 
冷水阀执行: 
初效: 
加湿器控制: 
变频值机: 
变频全速: 
变频开启: 
回风压差: 
回风温度: 
回风湿度: 
备用AO1: 
备用AO2: 
备用AO3: 
外急停开关: 
大地: PA2.6 PAX.5 | length 2076.5
  TopLayer w40: PA2.6@8696.29,3224.64 8735.11,3049.84 PA2.6@8773.93,3224.64 ; PA2.6@8735.11,3228.9 8735.11,2817.62 8820.51,2732.22 9670.84,2732.22 ; PAX.5@9744.59,2617.3 9744.59,2658.47 ; 9670.84,2732.22 PAX.5@9744.59,2627.3 ; 9670.84,2732.22 9744.59,2658.47 ; PAX.5@9744.59,2627.3 9744.59,2658.47 ; PAX.5@9744.59,2627.3 9744.59,2658.47
定量关: PB5.5 RL8.5 | length 1505.5
  TopLayer w80: PB5.5@11999.38,4155.73 11999.38,4246.92 12123.48,4371.02 12123.48,5009.8 12259.02,5009.8 ; RL8.5@12003.49,5013.54 RL8.5@12303.49,5013.54 ; RL8.5@12004.71,5014.35 12169.16,5014.35
定量开: PB5.4 RL8.3 | length 842.4
  TopLayer w80: PB5.4@11799.38,4155.73 11799.38,4331.41 12003.49,4535.52 RL8.3@12003.49,4613.54
  BottomLayer w80: RL8.3@11998.16,4612.42 RL8.3@12298.16,4612.42
密闭关: PB5.1 RL7.5 | length 1437.3
  TopLayer w60: PB5.1@11199.38,4155.73 11199.38,4250.77 11258.32,4309.71 11488,4309.71 11558.45,4380.15 11558.45,5009.8 ; RL7.5@11433.39,5009.8 11558.45,5009.8 ; RL7.5@11733.39,5009.8 11558.45,5009.8
密闭开: PB5.2 RL7.3 RN11.2 | length 933.7
  BottomLayer w80: PB5.2@11399.38,4155.73 11399.38,4166.3 11733.39,4500.31 ; RL7.3@11433.39,4609.8 11733.39,4609.8 11733.39,4500.31 ; RN11.2@11704.2,4471.12 11733.39,4500.31
手动调速: 
星接法: PC4.3 RL9.3 RN23.2 | length 3085.4
  BottomLayer w80: PC4.3@4171.02,4008.31 PC4.3@4184.87,4022.16 ; 4184.87,4177.37 RL9.3@4196.32,4460.44 ; 4184.87,4298 PC4.3@4171.46,3996.99 RN23.2@4195.2,4255.47 ; RL9.3@4212.67,4459.79 RL9.3@4496.32,4460.44 RL9.3@4213.45,4449.26 ; RL9.3@4475.81,4440.2 4484.87,4449.26 RL9.3@4184.87,4449.26 ; RL9.3@4478.52,4449.26 RL9.3@4196.32,4460.44 ; PC4.3@4184.87,4022.16 RL9.3@4184.87,4449.26 ; PC4.3@4184.87,4022.16 RN23.2@4195.2,4255.47 ; RL9.3@4184.87,4449.26 RN23.2@4195.2,4255.47 ; RN23.2@4195.2,4255.47 RL9.3@4196.32,4460.44
消防: 
热水阀执行: 
电高温: 
硬接线-温度: PA2.5 PAX.11 | length 1894.3
  TopLayer w30: PA2.5@8891.54,3222.39 8935.11,3079.84 PA2.5@8978.68,3222.39 ; PA2.5@8935.11,3228.9 8935.11,3059.23 8935.11,2891.73 9044.62,2782.22 9940.84,2782.22 10044.59,2678.47 PAX.11@10044.59,2617.3
硬接线-湿度: PA2.4 PAX.13 | length 1813.2
  TopLayer w30: PA2.4@9091.54,3222.39 9135.11,3079.84 PA2.4@9178.68,3222.39 ; PA2.4@9135.11,3228.9 9135.11,2857.3 9165.19,2827.22 9993.71,2827.22 10144.59,2676.34 PAX.13@10144.59,2617.3
管温: 
缺风: 
自动门开关1: 
自动门开关2: 
自动门开关3: 
自动门开关4: 
自动门开关5: 
自动门开关6: 
设定温度: 
设定湿度: 
负压: 
远值机: 
远启动: 
防冻: 
预热温感: 
预高温: 
频率控制: 
频率选择输出: 
高效: 
pads on no net: PB1'.2 RL1.5 RL2.5 RL3.5 RL4.5 RL5.5 RL6.5 RL10.5 RL11.5 RL12.5 RL13.5 RL14.5 RL15.5 RL16.5 RL17.5 RL18.5 RL19.5 RL20.5 RL21.5 RL22.5 RL34.3 SX1.5

## Other copper
TopLayer:
  region net L: 11262.19,4738.22 11278.18,4754.2 11278.18,4919.35 11251.54,4945.99 6099.88,4945.99 6015.31,5030.57 5770.77,5030.57 5740.2,4999.99 5740.2,4883.48 5807.54,4816.14 6052.6,4816.14 6119.86,4748.88
BottomLayer:
  region net L: 11262.19,4738.22 11278.18,4754.2 11278.18,4919.35 11251.54,4945.99 6099.88,4945.99 6015.31,5030.57 5770.77,5030.57 5740.2,4999.99 5740.2,4883.48 5807.54,4816.14 6052.6,4816.14 6119.86,4748.88

## Silkscreen, mask and mechanical layers (free items; w line width, h text height)
TopOverlay:
  drawing of 5668 lines, arcs and shapes, not listed
  text "AC1" at 11637.56,6454.96 h118.11
  text "AC2" at 11837.36,6452.99 h118.11
  text "PC7" at 3680,6393.88 h118.11
  text "PC6" at 4790,6393.88 h118.11
  text "24V" at 11299.32,6353.21 h118.11
  text "PB7" at 10408.5,6349.33 h118.11
  text "预热锁定" at 3323.86,6329.95 h118.11 r270
  text "加热锁定" at 3422.77,6330 h118.11 r270
  text "风机锁定" at 3520,6329.95 h118.11 r270
  text "应急" at 2484.91,6308.13 h118.11
  text "交流" at 11289.32,6273.21 h118.11
  text "零线" at 4627.81,6260.86 h118.11 r270
  text "火线" at 5240,6260 h118.11 r270
  text "PB6" at 11298.5,6159.33 h118.11
  text "CL-HC-V1.5-B" at 6886.63,5975.42 h200
  text "!!!应急开关!!!" at 2641.01,5790 h150
  text "PC7" at 2400.07,5770.93 h118.11
  text "(220V)" at 5757.54,5370 h118.11
  text "火线" at 5698.9,5272.28 h118.11
  text "PB5" at 11811.02,4343.06 h118.11
  text "零线" at 5738.9,4272.28 h118.11
  text "PB1" at 5746.05,4154.8 h118.11
  text "PC2" at 1528.9,4106.86 h118.11
  text "PB4" at 9326.15,4081.8 h118.11 r90
  text "PC1" at 1083.1,4079.5 h118.11
  text "PB3" at 7840.57,4072.18 h118.11 r90
  text "PC4" at 3450.88,4071.5 h118.11
  text "PB2" at 6172.3,4069.78 h118.11 r90
  text "(220V)" at 3360,3828.43 h118.11
  text "星接法" at 4140.12,3810.93 h118.11 r270
  text "(220V)" at 1312.84,3806.02 h118.11
  text "散热扇" at 4555.12,3805.93 h118.11 r270
  text "零线" at 285.12,3790.93 h118.11 r270
  text "(220V)" at 5234.73,3786.87 h118.11
  text "零线" at 1820.12,3785.93 h118.11 r270
  text "变频" at 3730.12,3765.93 h118.11 r270
  text "定频" at 3935.12,3765.93 h118.11 r270
  text "1#" at 6349.83,3764.79 h118.11 r90
  text "5#" at 8419.83,3764.73 h118.11 r90
  text "2#" at 6749.83,3763.99 h118.11 r90
  text "3#" at 7149.83,3763.99 h118.11 r90
  text "6#" at 8819.83,3763.47 h118.11 r90
  text "电预热" at 1036.81,3763.03 h118.11 r270
  text "4#" at 8019.83,3761.28 h118.11 r90
  text "电加热" at 1662.8,3761.06 h118.11 r270
  text "三角" at 4350.12,3760.93 h118.11 r270
  text "2#" at 685.12,3755.93 h118.11 r270
  text "3#" at 885.12,3755.93 h118.11 r270
  text "1#" at 485.12,3750.93 h118.11 r270
  text "2#" at 2220.12,3750.93 h118.11 r270
  text "3#" at 2420.12,3750.93 h118.11 r270
  text "1#" at 2020.12,3745.93 h118.11 r270
  text "零线" at 11682.02,3741.92 h118.11 r90
  text "负压" at 10299.83,3726.8 h118.11 r90
  text "PC5" at 4672.7,3725.34 h118.11
  text "零线" at 6549.83,3725.88 h118.11 r90
  text "零线" at 6949.83,3725.88 h118.11 r90
  text "零线" at 7349.83,3725.88 h118.11 r90
  text "零线" at 8219.83,3725.88 h118.11 r90
  text "零线" at 8619.83,3725.88 h118.11 r90
  text "零线" at 9019.83,3725.88 h118.11 r90
  text "停保" at 9499.83,3726.05 h118.11 r90
  text "零线" at 9699.83,3725.88 h118.11 r90
  text "零线" at 10099.83,3725.88 h118.11 r90
  text "零线" at 10499.83,3725.88 h118.11 r90
  text "零线" at 10899.83,3725.88 h118.11 r90
  text "(220V)" at -142.14,3718.5 h118.11
  text "定量关" at 12030.47,3702.28 h118.11 r90
  text "密闭关" at 11282.02,3697.76 h118.11 r90
  text "密闭开" at 11482.02,3697.82 h118.11 r90
  text "定量开" at 11902.8,3697.28 h118.11 r90
  text "PC3" at 2617.4,3696.62 h118.11
  text "电柜扇" at 10699.83,3684.6 h118.11 r90
  text "杀菌灯" at 9899.83,3682.99 h118.11 r90
  text "AC24V" at 12155.47,3682.28 h118.11 r90
  text "排风机" at 6713.94,3604.25 h118.11
  text "排风机" at 8425.85,3572.42 h118.11
  text "零线" at 2919.77,3559.82 h118.11 r90
  text "零线" at 3114.3,3549.97 h118.11 r90
  text "零线" at 4926.5,3549.97 h118.11 r90
  text "零线" at 5126.5,3549.97 h118.11 r90
  text "AC24V" at 11853.94,3534.25 h118.11
  text "(220V)" at 7924.42,3528.74 h118.11
  text "(220V)" at 9411.07,3528.74 h118.11
  text "(220V)" at 11077.52,3524.25 h118.11
  text "(220V)" at 6229.83,3508.74 h118.11
  text "回温" at 8896.5,3035.37 h118.11 r270
  text "回湿" at 9096.5,3035.37 h118.11 r270
  text "设温" at 9316.5,3035.37 h118.11 r270
  text "设湿" at 9506.5,3035.37 h118.11 r270
  text "运行" at 7654.43,3024.85 h118.11 r270
  text "值机" at 7804.43,3024.85 h118.11 r270
  text "滤网" at 7984.43,3024.85 h118.11 r270
  text "故障" at 8184.43,3024.85 h118.11 r270
  text "公共" at 8394.43,3024.85 h118.11 r270
  text "0V" at 9686.5,3005.37 h118.11 r270
  text "PE" at 8696.5,2995.37 h118.11 r270
  text "负压" at 9974.64,2897.46 h118.11
  text "远启" at 10785.7,2897.24 h118.11
  text "远值" at 10385.7,2896.45 h118.11
  text "PA1" at 10385.34,2800.18 h118.11
  text "PA2" at 9160.05,2773.88 h118.11
  text "PA3" at 7945.29,2771.25 h118.11
  text "情报面板硬接线扩展板" at 9404.59,2697.63 h118.11
  text "滤网" at 8781.43,1849.67 h118.11
  text "值机" at 8354.16,1848.35 h118.11
  text "运行" at 7872.99,1845.72 h118.11
  text "故障" at 9048.31,1749.75 h118.11
  text "CL-HC-A-V2.0" at 10526.02,1689.4 h200 r90
BottomSolder:
  lines w25: -10.67,4660.44 -10.67,4683.35 1343.53,4683.35 ; 299.61,3872.32 299.61,3767.06 503.4,3563.27 5086.65,3563.27 5086.65,3996.99 ; 300.09,3973.74 300.09,3841.96 403.58,3738.46 5075.24,3738.46 ; 415.5,3651.85 5074.21,3651.85 ; 673.02,4691.56 675.82,4694.36 675.82,5016.8 818.84,5159.82 3594.75,5159.82 3611.56,5176.63 3810.65,5375.73 3810.65,5545.66 3750,5606.31 3750,5980 3780,6010 3780,6170 ; 1566.95,4660.44 2918.7,4660.44 ; 1841.93,3564.25 1841.93,3995.93 ; 2743.35,4665.96 2743.35,4963.87 2796.31,5016.82 3658.88,5016.82 3835.53,5193.47 4319.63,5193.47 4361.53,5235.37 4361.53,5825.96 4277.49,5910 4065.81,5910 3980,5995.81 3980,6170 ; 2874.45,3566.22 2874.45,3996.99 ; 3074.45,3566.22 3074.45,3996.99 ; 3184.15,4654.8 3731.22,4654.8 ; 3662.01,4651.77 3949.81,4651.77 ; 3802.08,4652.83 3802.08,4890.55 3940.35,5028.82 4874.92,5028.82 ; 4180,6170 4271.28,6078.72 4577.66,6078.72 4874.92,5781.46 4874.92,5088.82 ; 4722.2,4660.44 5022.2,4660.44 ; 4874.92,4664.25 4874.92,5214.25 ; 4886.65,3566.22 4886.65,3996.99 ; 5812.09,4450.05 5868.5,4351.63 ; 5860.69,4909.06 6038.58,4909.06 ; 5870.31,4121.89 5870.31,4377.8 ; 5870.31,4514.83 5870.31,4101.37 6192.42,3779.25 6264.16,3707.52 11600.08,3707.52 ; 5892.15,4565.42 5976.08,4452.33 5976.08,4154.25 6315.53,3814.8 11600.08,3814.8 ; 6066.22,4905.46 11212.86,4905.46 ; 6067,4880.64 5813.89,4889.61 5932,4948.66 6038.58,4909.06 ; 6171.15,4602.53 6473.94,4602.53 6481.79,4594.68 6481.79,4460.36 6293.01,4271.58 6293.01,4122.73 ; 6211.12,3932.53 11600.08,3932.53 ; 6699.43,4146.34 6699.43,4351.63 6668.75,4382.31 6668.75,4574.42 6696.86,4602.53 6986.41,4602.53 ; 6899.43,3699.33 6899.43,4146.34 ; 7099.43,4146.34 7099.43,4293.84 7210.18,4404.59 7210.18,4583.79 7228.92,4602.53 7501.91,4602.53 ; 7299.43,3699.33 7299.43,4146.34 ; 7748.28,4602.53 8042.24,4602.53 ; 7969.43,4146.34 7969.43,4405.9 7988.38,4424.85 7988.38,4587.42 ; 8169.43,3699.33 8169.43,4146.34 ; 8369.43,4169.93 8369.43,4258.81 8271.54,4356.69 8271.54,4600.08 8274,4602.53 8554.71,4602.53 ; 8569.43,3699.33 8569.43,4146.34 ; 8754.38,4137.26 8754.38,4251.66 8799.71,4296.99 8799.71,4587.42 8803.34,4591.05 9081.11,4591.05 ; 8969.43,3699.33 8969.43,4146.34 ; 9462.29,4162.67 9462.29,4169.2 9328.25,4303.25 9328.25,4572.9 9357.88,4602.53 9618.4,4602.53 ; 9649.43,3699.33 9649.43,4166.34 ; 9849.43,4166.34 9849.43,4614.14 9861.04,4602.53 10141.17,4602.53 ; 10049.43,3699.33 10049.43,4166.34 ; 10257.34,4151.78 10257.34,4311.51 10398.92,4453.1 10398.92,4573.24 10428.21,4602.53 10645.78,4602.53 ; 10449.43,3699.33 10449.43,4166.34 ; 10649.43,4173.56 10649.43,4230.28 10896.28,4477.13 10896.28,4584.99 10909.59,4598.31 11188.61,4598.31 11197.59,4607.29 ; 10849.43,3699.33 10849.43,4166.34 ; 11221.27,4784.06 6163.58,4784.06 6038.58,4909.06 ; 11600.08,3686.96 11600.08,4153.96
Mechanical1:
  circle w10: c7498.16,1034.29 r66.93
  circle w10: c11041.47,1034.29 r66.93
  circle w10: c7498.16,-107.44 r66.93
  circle w10: c11041.47,-107.44 r66.93
  circle w10: c11041.47,1782.32 r66.93
  circle w10: c7498.16,1782.32 r66.93
  circle w10: c11041.47,2924.06 r66.93
  circle w10: c7498.16,2924.06 r66.93
  circle w10: c5817.32,6316.93 r66.93
  circle w10: c5817.32,3639.76 r66.93
  circle w10: c7635.26,4164.8 r66.93
  circle w10: c12313.39,3639.76 r66.93
  circle w10: c12313.39,6316.93 r66.93
  circle w10: c63.39,3641.73 r66.93
  circle w10: c63.39,6318.9 r66.93
  circle w10: c5496.46,6318.9 r66.93
  circle w10: c5417.72,3641.73 r66.93
  lines w10: -172.83,3622.05 ccw(c-35.04,3622.05) -35.04,3484.25 ; -172.83,6417.32 cw(c-35.04,6417.32) -35.04,6555.12 ; 5516.14,3484.25 ccw(c5516.14,3622.05) 5653.94,3622.05 ccw(c5791.73,3622.05) 5791.73,3484.25 ; 5516.14,6555.12 cw(c5516.14,6417.32) 5653.94,6417.32 cw(c5791.73,6417.32) 5791.73,6555.12 ; 7380.05,-205.86 ccw(c7517.85,-205.86) 7517.85,-343.66 ; 7380.05,1408.31 cw(c7517.85,1408.31) 7517.85,1546.1 ; 7380.05,1683.9 ccw(c7517.85,1683.9) 7517.85,1546.1 ; 7380.05,3298.07 cw(c7517.85,3298.07) 7517.85,3435.87 ; 11021.78,-343.66 ccw(c11021.78,-205.86) 11159.58,-205.86 ; 11021.78,1546.1 cw(c11021.78,1408.31) 11159.58,1408.31 ; 11021.78,1546.1 ccw(c11021.78,1683.9) 11159.58,1683.9 ; 11021.78,3435.87 cw(c11021.78,3298.07) 11159.58,3298.07 ; 12287.8,3484.25 ccw(c12287.8,3622.05) 12425.59,3622.05 ; 12287.8,6555.12 cw(c12287.8,6417.32) 12425.59,6417.32 ; 5653.94,3484.25 12425.59,3484.25 12425.59,6555.12 5653.94,6555.12 ; 5653.94,3484.25 5653.94,6555.12 ; 5653.94,3484.25 -172.83,3484.25 -172.83,6555.12 5653.94,6555.12 ; 5653.94,3484.25 5653.94,6555.12 ; 7380.05,1546.1 11159.58,1546.1 ; 7380.05,1546.1 7380.05,-343.66 11159.58,-343.66 11159.58,1546.1 ; 7380.05,1546.1 11159.58,1546.1 ; 7380.05,1546.1 7380.05,3435.87 11159.58,3435.87 11159.58,1546.1
  text "PCB名称: CL-HC-C-V2.0" at -47.54,7910.72 h120
  text "PCB名称: CL-HC-V1.5-B" at 5818.6,7910.72 h120
  text "尺寸： 14.8CM*7.8CM" at -47.42,7772.81 h120
  text "尺寸： 17.2CM*7.8CM" at 5818.72,7772.81 h120
  text "板材：  FR4" at -47.42,7633.88 h120
  text "板材：  FR4" at 5818.72,7633.88 h120
  text "板子层数：  2" at -47.42,7495.75 h120
  text "板子层数：  2" at 5818.72,7495.75 h120
  text "板子厚度：  1.6" at -47.42,7356.58 h120
  text "板子厚度：  1.6" at 5818.72,7356.58 h120
  text "阻焊颜色：  蓝色" at -47.54,7218.34 h120
  text "阻焊颜色：  蓝色" at 5818.6,7218.34 h120
  text "铜箔厚度：  h/hoz" at -47.54,7079.17 h120
  text "铜箔厚度：  h/hoz" at 5818.6,7079.17 h120
  text "阻焊覆盖：  过孔盖油" at -47.54,6940.35 h120
  text "阻焊覆盖：  过孔盖油" at 5818.6,6940.35 h120
  text "字符颜色：  白色" at -47.42,6802.22 h120
  text "字符颜色：  白色" at 5818.72,6802.22 h120
  text "焊盘喷镀：  有铅喷锡" at -47.42,6663.17 h120
  text "焊盘喷镀：  有铅喷锡" at 5818.72,6663.17 h120
  text "PCB名称: CL-HC-A-V2.0" at 11309.16,3128.96 h120
  text "尺寸： 9.6CM*9.6CM" at 11309.28,2991.05 h120
  text "板材：  FR4" at 11309.28,2852.12 h120
  text "板子层数：  2" at 11309.28,2713.99 h120
  text "板子厚度：  1.6" at 11309.28,2574.82 h120
  text "阻焊颜色：  蓝色" at 11309.16,2436.58 h120
  text "铜箔厚度：  h/hoz" at 11309.16,2297.41 h120
  text "阻焊覆盖：  过孔盖油" at 11309.16,2158.59 h120
  text "字符颜色：  白色" at 11309.28,2020.46 h120
  text "焊盘喷镀：  有铅喷锡" at 11309.28,1881.41 h120
DrillDrawing:
  text ".legend" at 12807.8,748.62 h80